# Allegro board pc049a_4lemos_03.brd
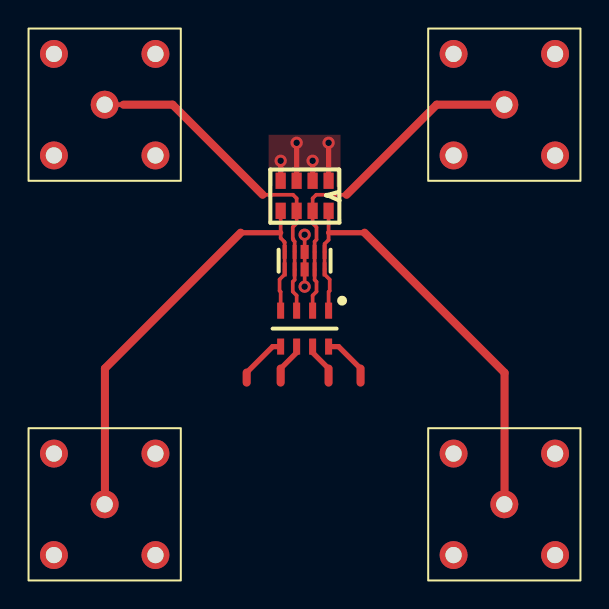
[diagram p0: board, top side]
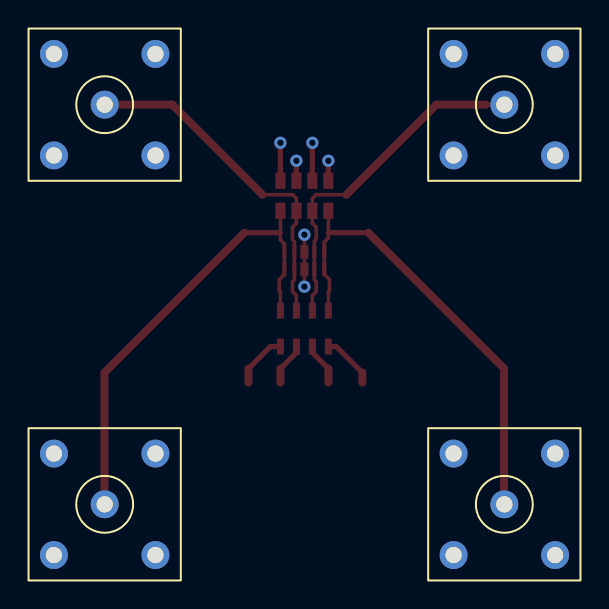
[diagram p1: board, bottom side, seen from below]

No outline. copper layers: TOP, L2, L3, BOTTOM. Coordinates in mm from the lowest, leftmost part position.

## Design rules (mm)
net group ANALOG_IN: nets ANALOG_IN<0> ANALOG_IN<1> ANALOG_IN<2> ANALOG_IN<3>

## Placement (name value [footprint] x y rotation side)
CN1  100nF/16V  [CAPCAF80P160X320X110-8N]  10 8.8 270 top
D1  -  [DIO_LITTELFUSE_SP3010]  10 12.2 0 top
PX1  -  [PLEMOD80]  0 0 180 bottom
PX2  -  [PLEMOD80]  0 20 180 bottom
PX3  -  [PLEMOD80]  20 20 180 bottom
PX4  -  [PLEMOD80]  20 0 180 bottom
RZ1  180  [ARC241_SO8]  11.2 16.2 180 top

## Library data of the parts
CN1 = CAPN4I: part number: CAPN4I-100NF,16V,X7R,CKCA43
D1 = TVS_DIODE_ARRAY_SP3010: part number: TVS_DIODE_ARRAY_SP3010_UDFN-SP3010-04UTG
PX1-PX4 = COAX: part number: COAX-PLEMO00D
RZ1 = R4ISMD: part number: R4ISMD_1206-180

## Footprints (pads in the part's own frame, mm; a bottom-side part is the same pattern mirrored in y, then rotated)
ARC241_SO8
  rect 0.508x0.813 smd: 1(0,0) 2(0.8,0) 3(1.6,0) 4(2.4,0) 5(2.4,1.505) 6(1.6,1.505) 7(0.8,1.505) 8(0,1.505)
CAPCAF80P160X320X110-8N
  rect 0.8x0.35 smd: 1(-0.9,1.2) 2(0.9,1.2) 3(-0.9,0.4) 4(0.9,0.4) 5(-0.9,-0.4) 6(0.9,-0.4) 7(-0.9,-1.2) 8(0.9,-1.2)
DIO_LITTELFUSE_SP3010
  rect 0.2x0.7 smd: 1(1,0.437) 2(0.5,0.437) 4(-0.5,0.437) 5(-1,0.437) 6(-1,-0.438) 7(-0.5,-0.438) 9(0.5,-0.438) 10(1,-0.438)
  rect 0.4x0.7 smd: 3(0,0.437) 8(0,-0.438)
PLEMOD80
  round 1.397 hole 0.813: 1(0.006,0.007) 2(-2.534,-2.533) 3(2.546,-2.533) 4(2.546,2.547) 5(-2.534,2.547)

## Nets
GND_SIGNAL: D1.3(GND1) D1.8(GND2) PX1.2(B<0>) PX1.3(B<1>) PX1.4(B<2>) PX1.5(B<3>) PX2.2(B<0>) PX2.3(B<1>) PX2.4(B<2>) PX2.5(B<3>) PX3.2(B<0>) PX3.3(B<1>) PX3.4(B<2>) PX3.5(B<3>) PX4.2(B<0>) PX4.3(B<1>) PX4.4(B<2>) PX4.5(B<3>) RZ1.1(A<0>) RZ1.2(A<0>) RZ1.3(A<0>) RZ1.4(A<0>)
ANALOG_IN<0>: CN1.8(B<0>)
ANALOG_IN<1>: CN1.6(B<0>)
ANALOG_IN<2>: CN1.4(B<0>)
ANALOG_IN<3>: CN1.2(B<0>)
UNNAMED_1_CAPN4I_I10_A: CN1.1(A<0>) D1.1(A1) D1.10(B1) PX4.1(A) RZ1.8(B<0>)
UNNAMED_1_CAPN4I_I10_A_1: CN1.3(A<0>) D1.2(A2) D1.9(B2) PX3.1(A) RZ1.7(B<0>)
UNNAMED_1_CAPN4I_I10_A_2: CN1.5(A<0>) D1.4(A3) D1.7(B3) PX2.1(A) RZ1.6(B<0>)
UNNAMED_1_CAPN4I_I10_A_3: CN1.7(A<0>) D1.5(A4) D1.6(B4) PX1.1(A) RZ1.5(B<0>)

## Via types
v1: diameter 0.61, hole 0.33, TOP to BOTTOM, 6 vias

## Routing (per net, layer and track width the routed paths; a pad name or vN(x,y) marks a point on that pad's centre or on a via; arc(x,y) is an arc through that point)
GND_SIGNAL: length 8.4
  TOP w0.18: v1(10,10.9) D1.8 D1.3 v1(10,13.5)
  TOP w0.226: 11.2,16.3 RZ1.1
  TOP w0.26: v1(11.2,18.1) 11.2,16.3 ; RZ1.4 v1(8.8,17.2) ; RZ1.3 v1(9.6,18.1) ; RZ1.2 v1(10.4,17.2)
ANALOG_IN<0>: length 2.7
  TOP w0.26: 7.1,6.6 8.4,7.9 CN1.8
  TOP w0.4: 7.1,6.1 7.1,6.6
ANALOG_IN<1>: length 2.1
  TOP w0.26: CN1.6 9.6,7.6 8.8,6.8
  TOP w0.4: 8.8,6.1 8.8,6.8
ANALOG_IN<2>: length 2.1
  TOP w0.26: 11.2,6.8 10.4,7.6 CN1.4
  TOP w0.4: 11.2,6.1 11.2,6.8
ANALOG_IN<3>: length 2.8
  TOP w0.26: CN1.2 11.7,7.9 12.8,6.8
  TOP w0.4: 12.8,6.1 12.8,6.8
UNNAMED_1_CAPN4I_I10_A: length 23.5
  TOP w0.18: CN1.1 11.2,10.64 11.25,10.69 11.25,11.26 11,11.51 D1.10 D1.1 11,13.04 11.2,13.24 RZ1.8
  TOP w0.226: 20.01,0.01 PX4.1
  TOP w0.26: 11.2,13.6 13,13.6
  TOP w0.4: 13,13.6 20.01,6.59 20.01,0.01
UNNAMED_1_CAPN4I_I10_A_1: length 17.4
  TOP w0.18: 12.1,15.5 10.58,15.5 10.4,15.32 RZ1.7 10.4,14.07 10.59,13.88 10.59,13.25 10.5,13.16 D1.2 D1.9 10.5,11.24 10.59,11.15 10.59,10.65 10.4,10.46 CN1.3
  TOP w0.4: 12.1,15.5 16.61,20.01 PX3.1 20.01,20.01
UNNAMED_1_CAPN4I_I10_A_2: length 17.4
  TOP w0.18: CN1.5 9.6,10.46 9.41,10.65 9.41,11.15 9.5,11.24 D1.7 D1.4 9.5,13.16 9.44,13.22 9.44,13.28 9.41,13.31 9.41,13.88 9.6,14.07 RZ1.6 9.6,15.32 9.42,15.5 7.9,15.5
  TOP w0.226: 0.93,20.01 PX2.1
  TOP w0.4: 0.93,20.01 3.39,20.01 7.9,15.5
UNNAMED_1_CAPN4I_I10_A_3: length 23.6
  TOP w0.18: CN1.7 8.8,10.64 8.75,10.69 8.75,11.26 9,11.51 D1.6 D1.5 9,13.1 8.99,13.11 8.99,13.14 8.8,13.33 RZ1.5
  TOP w0.226: 0.01,0.01 PX1.1
  TOP w0.26: 8.8,13.6 6.8,13.6
  TOP w0.4: 0.01,0.01 0.01,6.81 6.8,13.6

## Copper pours and planes (outline as drawn; the poured copper is in the pictures)
GND_SIGNAL on TOP: 8.2,15.9 11.8,15.9 11.8,18.5 8.2,18.5
